# EAGLE board ruan_john_tinkercad (EAGLE 9.7.0)

Size 392.43 x 298.47 mm. Coordinates in mm from the lower left corner, seen from the top.
Outline: 0,0 392.43,0 392.43,298.47 0,298.47 0,0
Copper layers (1*16): Top 0.035mm / dielectric 1.5mm / Bottom 0.035mm
Design rules "default": minimum track width 6mil, minimum drill 0.35mm, track to track 6mil, track to pad 6mil, pad to pad 6mil, via to via 6mil, smd to smd 6mil, copper to edge 40mil, drill to drill 6mil, minimum pad ring 10mil, minimum via ring 8mil, stop-mask expansion 4mil, vias tented up to drill 0mil, thermal gap 10mil

## Footprints (pad centres in the part's own frame; a part is rotated, then mirrored left to right if it is on the bottom)
LEDRD254W60D565H860B = drill 0.981 pad 1.581: 1 -1.27,0; 2 1.27,0
LEDRD254W60D565H860B_G = drill 0.981 pad 1.581: 1 -1.27,0; 2 1.27,0
BATTERY-GENERIC = drill 1.118 pad 3.15 octagon: + 2.54,0; - -2.54,0
RESAD1016W63L850D250B = drill 0.83 pad 1.43: 1 -5.08,0; 2 5.08,0
SWITCH-MOMENTARY-PTH-6.5MM = drill 1.016 pad 1.88: 1 -3.251,2.261; 2 3.251,2.261; 3 -3.251,-2.261; 4 3.251,-2.261
SWITCH-SPDT-PTH-8.5X3.7MM = drill 1.016 pad 1.88: 1 -2.54,0; 2 0,0; 3 2.54,0
78B04ST = drill 0.8: 1 -3.81,-3.81; 2 -1.27,-3.81; 3 1.27,-3.81; 4 3.81,-3.81; 5 3.81,3.81; 6 1.27,3.81; 7 -1.27,3.81; 8 -3.81,3.81
DIP762W53P254L1969H508Q14B = drill 0.743 pad 1.343: 1 -3.81,7.62; 2 -3.81,5.08; 3 -3.81,2.54; 4 -3.81,0; 5 -3.81,-2.54; 6 -3.81,-5.08; 7 -3.81,-7.62; 8 3.81,-7.62; 9 3.81,-5.08; 10 3.81,-2.54; 11 3.81,0; 12 3.81,2.54; 13 3.81,5.08; 14 3.81,7.62

## Placement (x,y rotation side)
D1  RED  [LEDRD254W60D565H860B]  359.62,124.5 0 top
D3  RED  [LEDRD254W60D565H860B]  155.82,256.44 180 top
D6  RED  [LEDRD254W60D565H860B]  72.43,75.19 0 top
D7  GREEN  [LEDRD254W60D565H860B_G]  67.35,75.19 0 top
P2  BATTERYGENERIC  [BATTERY-GENERIC]  8.26,290.21 180 top
P4  BATTERYGENERIC  [BATTERY-GENERIC]  384.18,48.34 180 top
R1  1k  [RESAD1016W63L850D250B]  353.27,121.96 180 top
R3  300  [RESAD1016W63L850D250B]  172.33,261.52 180 top
R6  300  [RESAD1016W63L850D250B]  71.16,80.27 0 top
R7  300  [RESAD1016W63L850D250B]  76.24,82.81 0 top
S1  SWITCH_MOMENTARY  [SWITCH-MOMENTARY-PTH-6.5MM]  348.19,138.47 90 top
S2  TOGGLE  [SWITCH-SPDT-PTH-8.5X3.7MM]  317.71,121.96 0 top
SW1  SPST-478B04ST  [78B04ST]  28.82,252.63 0 top
SW2  SPST-478B04ST  [78B04ST]  286.72,65.89 0 top
SW7  SPST-478B04ST  [78B04ST]  314.66,65.89 0 top
SW8  SPST-478B04ST  [78B04ST]  296.88,65.89 0 top
U1  74HC08_PDIP  [DIP762W53P254L1969H508Q14B]  85.97,252.63 90 top
U2  74HC04_PDIP  [DIP762W53P254L1969H508Q14B]  55.49,252.63 90 top
U5  74HC04_PDIP  [DIP762W53P254L1969H508Q14B]  301.09,8.41 90 top
U6  74HC08_PDIP  [DIP762W53P254L1969H508Q14B]  280.77,8.41 90 top
U7  74HC11_PDIP  [DIP762W53P254L1969H508Q14B]  260.45,8.41 90 top
U8  74HC32_PDIP  [DIP762W53P254L1969H508Q14B]  186.79,8.41 90 top
U9  74HC11_PDIP  [DIP762W53P254L1969H508Q14B]  126.61,252.63 90 top
U10  74HC32_PDIP  [DIP762W53P254L1969H508Q14B]  177.41,252.63 90 top
U11  74HC32_PDIP  [DIP762W53P254L1969H508Q14B]  169.01,8.41 90 top
U12  74HC11_PDIP  [DIP762W53P254L1969H508Q14B]  242.67,8.41 90 top
U13  74HC11_PDIP  [DIP762W53P254L1969H508Q14B]  224.89,8.41 90 top
U14  74HC11_PDIP  [DIP762W53P254L1969H508Q14B]  207.11,8.41 90 top
U15  74HC86_PDIP  [DIP762W53P254L1969H508Q14B]  254.97,65.89 90 top
U16  74HC86_PDIP  [DIP762W53P254L1969H508Q14B]  272.75,65.89 90 top
U17  74HC08_PDIP  [DIP762W53P254L1969H508Q14B]  237.19,65.89 90 top
U18  74HC32_PDIP  [DIP762W53P254L1969H508Q14B]  127.04,71.38 90 top
U19  74HC04_PDIP  [DIP762W53P254L1969H508Q14B]  183.85,65.89 90 top
U20  74HC08_PDIP  [DIP762W53P254L1969H508Q14B]  219.41,65.89 90 top
U21  74HC08_PDIP  [DIP762W53P254L1969H508Q14B]  116.94,12.49 90 top
U22  74HC32_PDIP  [DIP762W53P254L1969H508Q14B]  91.54,12.49 90 top
U23  74HC04_PDIP  [DIP762W53P254L1969H508Q14B]  201.63,65.89 90 top
U24  74HC08_PDIP  [DIP762W53P254L1969H508Q14B]  104.18,71.38 90 top

## Library data of the parts
D1 D3 D6 = Tinkercad; CATEGORY: Opto-Electronic; SUB-CATEGORY: LED; VALUE: LED_RED
D7 = Tinkercad; CATEGORY: Opto-Electronic; SUB-CATEGORY: LED; VALUE: LED_GREEN
P2 P4 R1 R3 R6 R7 S1 S2 SW1 SW2 SW7 SW8 U1 U2 U5-U24 = Tinkercad

## Nets
D1_A: D1.1 R1.1
D3_A: D3.1 R3.2
D6_A: D6.1 R7.1
D7_A: D7.1 R6.1
P2+: P2.+ SW1.5 SW1.6 SW1.7 SW1.8 U1.14 U2.14 U9.14 U10.14
P2-: D3.2 P2.- U1.7 U2.7 U9.7 U10.7
P4+: P4.+ S2.3 SW2.5 SW2.6 SW2.7 SW2.8 SW7.5 SW7.6 SW7.7 SW7.8 SW8.5 SW8.6 SW8.7 SW8.8 U5.14 U6.14 U7.14 U8.14 U11.14 U12.14 U13.14 U14.14 U15.14 U16.14 U17.14 U18.14 U19.14 U20.14 U21.14 U22.14 U23.14 U24.14
P4-: D1.2 D6.2 D7.2 P4.- S2.1 U5.7 U6.7 U7.7 U8.7 U11.7 U12.7 U13.7 U14.7 U15.7 U16.7 U17.7 U18.7 U19.7 U20.7 U21.7 U22.7 U23.7 U24.7
S1_2: S1.1 S1.2
S1_3: S1.3 S1.4
U1_1B: SW1.2 U1.2 U1.4
U1_1Y: U1.3 U10.2
U1_2Y: U1.6 U10.4
U2_1A: SW1.1 U2.1 U9.3
U2_1Y: U1.1 U2.2 U9.13
U2_2A: SW1.3 U2.3 U9.1
U2_2Y: U2.4 U9.4
U2_3A: SW1.4 U2.5 U9.2
U2_3Y: U1.5 U2.6 U9.5
U5_3A: SW7.4 U5.5 U7.1 U12.2 U12.10 U13.1 U13.9
U5_3Y: U5.6 U6.1 U6.5 U6.10 U7.9 U12.5 U21.1
U5_4A: SW7.3 U5.9 U6.4 U7.2 U7.5 U13.2 U13.5 U13.10 U14.5
U5_4Y: U5.8 U6.9 U7.10 U12.1 U14.13
U5_5Y: U5.10 U12.9 U13.3 U14.1
U5_6A: SW7.1 U5.13 U7.11 U12.4 U12.11 U13.4 U13.13 U14.2 U14.3 U21.2
U5_6Y: U5.12 U6.13 U7.3 U7.13 U12.13
U6_1Y: U6.3 U8.9
U6_2Y: U6.6 U8.1
U6_3Y: U6.8 U22.1
U6_4Y: U6.11 U8.12
U7_1Y: U7.12 U8.13
U7_2Y: U7.6 U8.2
U7_3Y: U7.8 U8.10
U8_1Y: U8.3 U11.1
U8_2Y: U8.6 U11.2
U8_3Y: U8.8 U11.12
U8_4Y: U8.11 U11.13
U9_1Y: U9.12 U10.1
U9_2Y: U9.6 U10.5
U10_1Y: U10.3 U10.13
U10_2Y: U10.6 U10.12
U10_4Y: R3.1 U10.11
U11_2Y: U11.6 U22.12
U11_3Y: U11.8 U22.13
U11_4Y: U11.11 U15.2 U16.2
U12_1Y: U11.5 U12.12
U12_2A: SW7.2 U5.11 U6.2 U6.12 U7.4 U12.3 U13.11 U14.4
U12_2Y: U8.5 U12.6
U12_3Y: U8.4 U12.8
U13_1Y: U11.10 U13.12
U13_2Y: U11.9 U13.6
U13_3Y: U11.4 U13.8
U14_1Y: U14.12 U22.9
U14_2Y: U14.6 U22.10
U15_1A: SW8.1 U15.1
U15_1Y: U15.3 U19.3
U15_2A: SW8.2 U15.4
U15_2Y: U15.6 U19.5
U15_3B: SW8.4 U15.10
U15_3Y: U15.8 U19.11
U15_4B: SW8.3 U15.13
U15_4Y: U15.11 U19.13
U16_1A: SW2.1 U16.1
U16_1Y: U16.3 U23.1
U16_2A: SW2.2 U16.4
U16_2B: U11.3 U15.5 U16.5
U16_2Y: U16.6 U23.3
U16_3B: SW2.4 U16.10
U16_3Y: U16.8 U23.11
U16_4B: SW2.3 U16.13
U16_4Y: U16.11 U23.13
U17_1Y: U17.3 U17.4
U17_2Y: U17.6 U18.2
U18_1Y: U18.3 U19.1 U24.1
U19_1Y: U19.2 U24.5
U19_2Y: U17.1 U19.4
U19_3Y: U17.2 U19.6
U19_5Y: U19.10 U20.9
U19_6Y: U19.12 U20.10
U20_1Y: U20.3 U20.4
U20_2Y: U18.1 U20.6
U20_3Y: U17.5 U20.8
U20_4Y: U20.5 U20.11
U21_1Y: U21.3 U22.2
U22_1Y: U22.3 U22.4
U22_2Y: U15.9 U16.9 U22.6
U22_3Y: U22.5 U22.8
U22_4Y: U15.12 U16.12 U22.11
U23_1Y: U20.1 U23.2
U23_2Y: U20.2 U23.4
U23_5Y: U20.12 U23.10
U23_6Y: U20.13 U23.12
U24_1B: R1.2 S2.2 U24.2 U24.4
U24_1Y: R6.2 U24.3
U24_2Y: R7.2 U24.6

## Tracks (layer width: path | path; a pad name or v marks a point on that pad's centre or on a via)
D1_A  (1 unrouted)
D3_A  (1 unrouted)
D6_A  (1 unrouted)
D7_A  (1 unrouted)
P2+  (8 unrouted)
P2-  (5 unrouted)
P4+  (31 unrouted)
P4-  (22 unrouted)
S1_2  (1 unrouted)
S1_3  (1 unrouted)
U1_1B  (2 unrouted)
U1_1Y  (1 unrouted)
U1_2Y  (1 unrouted)
U2_1A  (2 unrouted)
U2_1Y  (2 unrouted)
U2_2A  (2 unrouted)
U2_2Y  (1 unrouted)
U2_3A  (2 unrouted)
U2_3Y  (2 unrouted)
U5_3A  (6 unrouted)
U5_3Y  (6 unrouted)
U5_4A  (8 unrouted)
U5_4Y  (4 unrouted)
U5_5Y  (3 unrouted)
U5_6A  (9 unrouted)
U5_6Y  (4 unrouted)
U6_1Y  (1 unrouted)
U6_2Y  (1 unrouted)
U6_3Y  (1 unrouted)
U6_4Y  (1 unrouted)
U7_1Y  (1 unrouted)
U7_2Y  (1 unrouted)
U7_3Y  (1 unrouted)
U8_1Y  (1 unrouted)
U8_2Y  (1 unrouted)
U8_3Y  (1 unrouted)
U8_4Y  (1 unrouted)
U9_1Y  (1 unrouted)
U9_2Y  (1 unrouted)
U10_1Y  (1 unrouted)
U10_2Y  (1 unrouted)
U10_4Y  (1 unrouted)
U11_2Y  (1 unrouted)
U11_3Y  (1 unrouted)
U11_4Y  (2 unrouted)
U12_1Y  (1 unrouted)
U12_2A  (7 unrouted)
U12_2Y  (1 unrouted)
U12_3Y  (1 unrouted)
U13_1Y  (1 unrouted)
U13_2Y  (1 unrouted)
U13_3Y  (1 unrouted)
U14_1Y  (1 unrouted)
U14_2Y  (1 unrouted)
U15_1A  (1 unrouted)
U15_1Y  (1 unrouted)
U15_2A  (1 unrouted)
U15_2Y  (1 unrouted)
U15_3B  (1 unrouted)
U15_3Y  (1 unrouted)
U15_4B  (1 unrouted)
U15_4Y  (1 unrouted)
U16_1A  (1 unrouted)
U16_1Y  (1 unrouted)
U16_2A  (1 unrouted)
U16_2B  (2 unrouted)
U16_2Y  (1 unrouted)
U16_3B  (1 unrouted)
U16_3Y  (1 unrouted)
U16_4B  (1 unrouted)
U16_4Y  (1 unrouted)
U17_1Y  (1 unrouted)
U17_2Y  (1 unrouted)
U18_1Y  (2 unrouted)
U19_1Y  (1 unrouted)
U19_2Y  (1 unrouted)
U19_3Y  (1 unrouted)
U19_5Y  (1 unrouted)
U19_6Y  (1 unrouted)
U20_1Y  (1 unrouted)
U20_2Y  (1 unrouted)
U20_3Y  (1 unrouted)
U20_4Y  (1 unrouted)
U21_1Y  (1 unrouted)
U22_1Y  (1 unrouted)
U22_2Y  (2 unrouted)
U22_3Y  (1 unrouted)
U22_4Y  (2 unrouted)
U23_1Y  (1 unrouted)
U23_2Y  (1 unrouted)
U23_5Y  (1 unrouted)
U23_6Y  (1 unrouted)
U24_1B  (3 unrouted)
U24_1Y  (1 unrouted)
U24_2Y  (1 unrouted)